# EAGLE board POWER SUPPLY 1 (EAGLE 6.1)
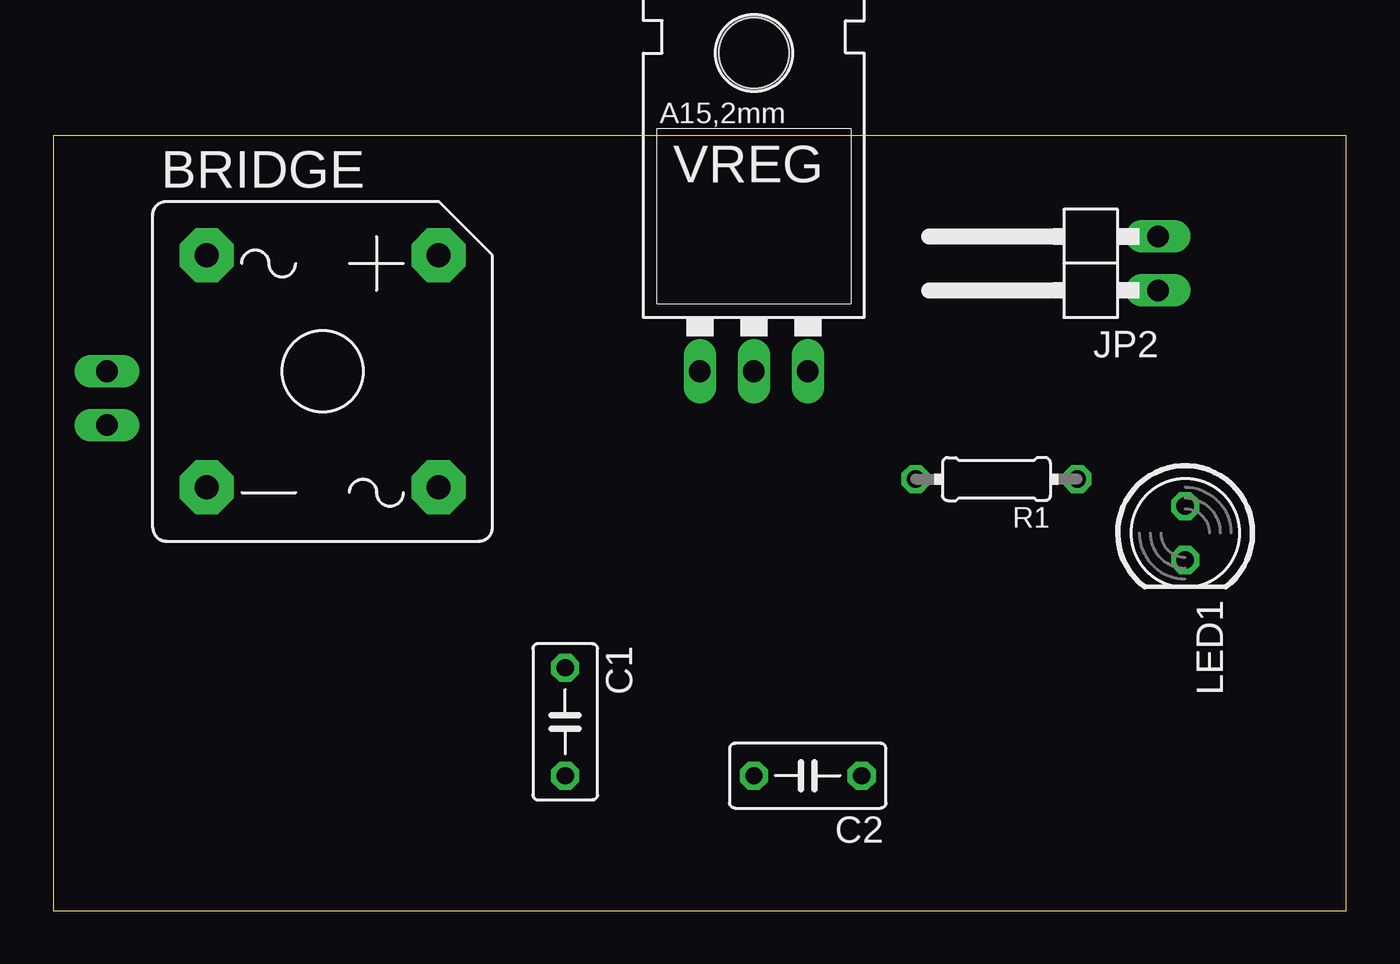
[diagram p0: board, top side]
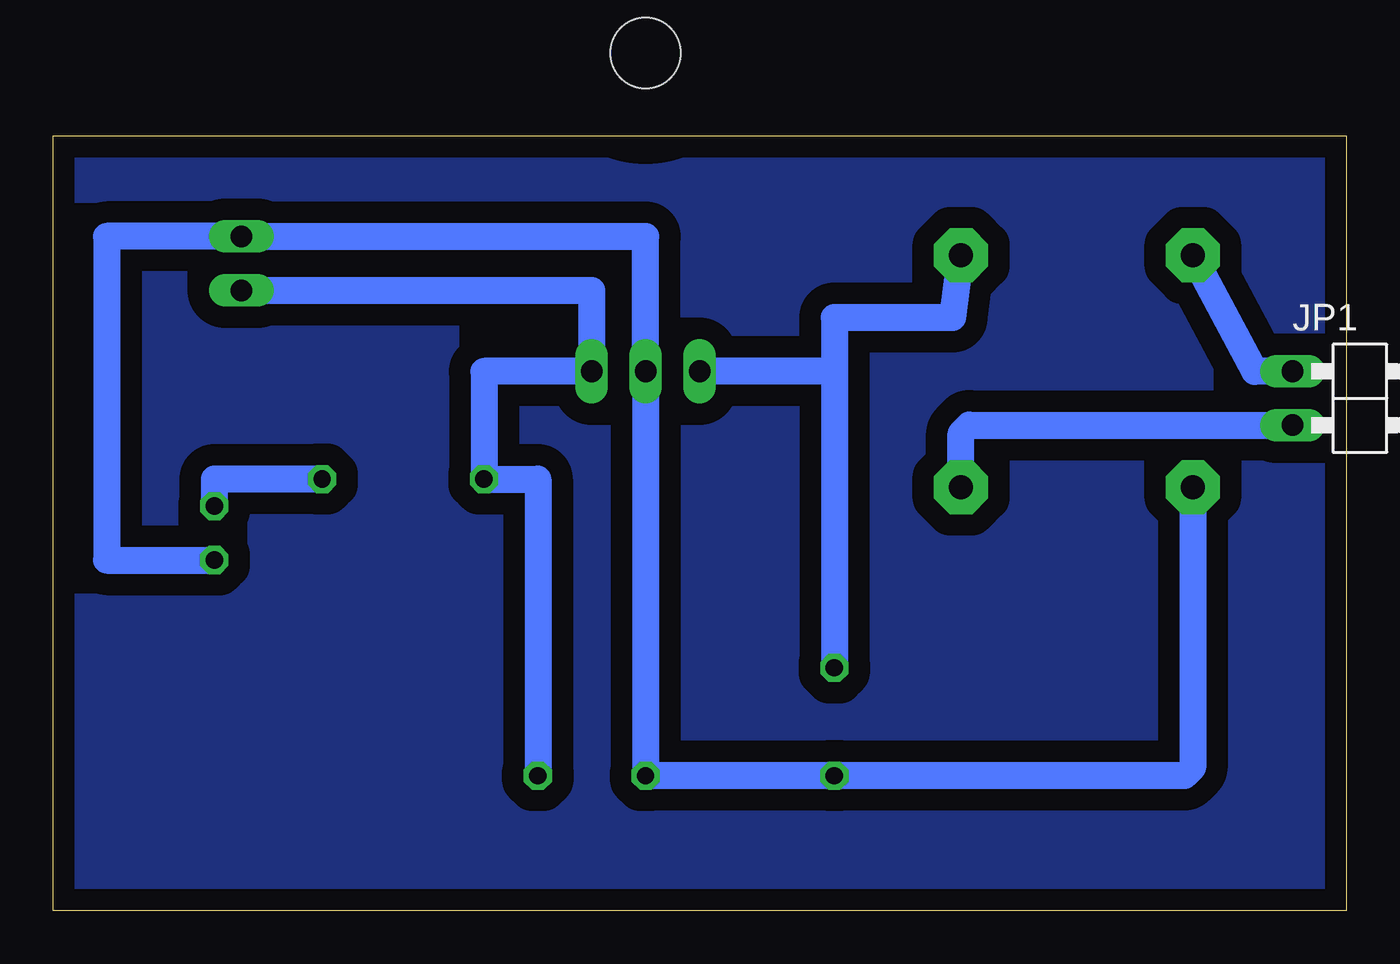
[diagram p1: board, bottom side, seen from below]

Size 60.94 x 36.5 mm. Coordinates in mm from the lower left corner, seen from the top.
Outline: 0,0 60.94,0 60.94,36.5 0,36.5 0,0
Copper layers (1*16): Top 0.035mm / dielectric 1.5mm / Bottom 0.035mm
Design rules: minimum track width 10mil, minimum drill 24mil, track to track 8mil, track to pad 8mil, pad to pad 8mil, via to via 8mil, smd to smd 8mil, copper to edge 40mil, drill to drill 8mil, minimum pad ring 10mil, minimum via ring 8mil, stop-mask expansion 4mil, vias tented up to drill 0mil, thermal gap 10mil

## Footprints (pad centres in the part's own frame; a part is rotated, then mirrored left to right if it is on the bottom)
GBPC1 = drill 1.118 pad 2.54 octagon: + 5.461,5.461; - -5.461,-5.461; AC1 -5.461,5.461; AC2 5.461,-5.461
C050-030X075 = drill 0.813 octagon: 1 -2.54,0; 2 2.54,0
1X02/90 = drill 1.016 long: 1 -1.27,-3.81; 2 1.27,-3.81
LED5MM = drill 0.813 octagon: A -1.27,0; K 1.27,0
0204/7 = drill 0.813 octagon: 1 -3.81,0; 2 3.81,0
78XXL = drill 1.016 long: GND 0,-3.81; IN -2.54,-3.81; OUT 2.54,-3.81 | hole 3.302: 0,11.176

## Placement (x,y rotation side)
BRIDGE  [GBPC1]  12.7,25.4 0 top
C1  220 UF  [C050-030X075]  24.13,8.89 270 top
C2  0.01UF  [C050-030X075]  35.56,6.35 180 top
JP1  [1X02/90]  -1.27,24.13 270 bottom
JP2  [1X02/90]  48.26,30.48 90 top
LED1  5MM  [LED5MM]  53.34,17.78 270 top
R1  220E  [0204/7]  44.45,20.32 180 top
VREG  7805  [78XXL]  33.02,29.21 0 top

## Library data of the parts
BRIDGE = rectifier
C1 C2 R1 = rcl
JP1 JP2 = pinhead
LED1 = led
VREG = v-reg

## Nets
GND: BRIDGE.- C1.2 C2.2 JP2.2 LED1.K VREG.GND
N$1: BRIDGE.AC1 JP1.1
N$2: BRIDGE.AC2 JP1.2
N$3: BRIDGE.+ C1.1 VREG.IN
N$5: C2.1 JP2.1 R1.2 VREG.OUT
N$6: LED1.A R1.1

## Tracks (layer width: path | path; a pad name or v marks a point on that pad's centre or on a via)
GND
  Bottom 1.27: BRIDGE.- 7.24,6.73 7.62,6.35 C1.2 C2.2 VREG.GND 33.02,31.75 JP2.2 58.42,31.75 58.42,16.51 LED1.K
N$1
  Bottom 1.27: JP1.1 4.32,25.4 BRIDGE.AC1
N$2
  Bottom 1.27: BRIDGE.AC2 18.16,22.48 17.78,22.86 JP1.2
N$3
  Bottom 1.27: BRIDGE.+ 18.54,27.94 24.13,27.94 24.13,25.4 | 24.13,25.4 C1.1 | 24.13,25.4 VREG.IN
N$4
  pour Bottom: 0,36.83 60.96,36.83 60.96,35.56
N$5
  Bottom 1.27: C2.1 38.1,20.32 R1.2 40.64,25.4 VREG.OUT 35.56,29.21 JP2.1
N$6
  Bottom 1.27: R1.1 53.34,20.32 LED1.A
N$7
  pour Bottom (isolate 1.016): 0,36.83 60.96,36.83 60.96,0 0,0